# Altium PCB VTS_demo.PcbDoc
Units mil, origin at the board's own origin, x right, y up, seen from the top; angles counter-clockwise.
Board outline 910 x 1965 mil, 2 copper layers (Top Layer, Bottom Layer); 19 components, 18 nets, 80 pads, 5 vias.
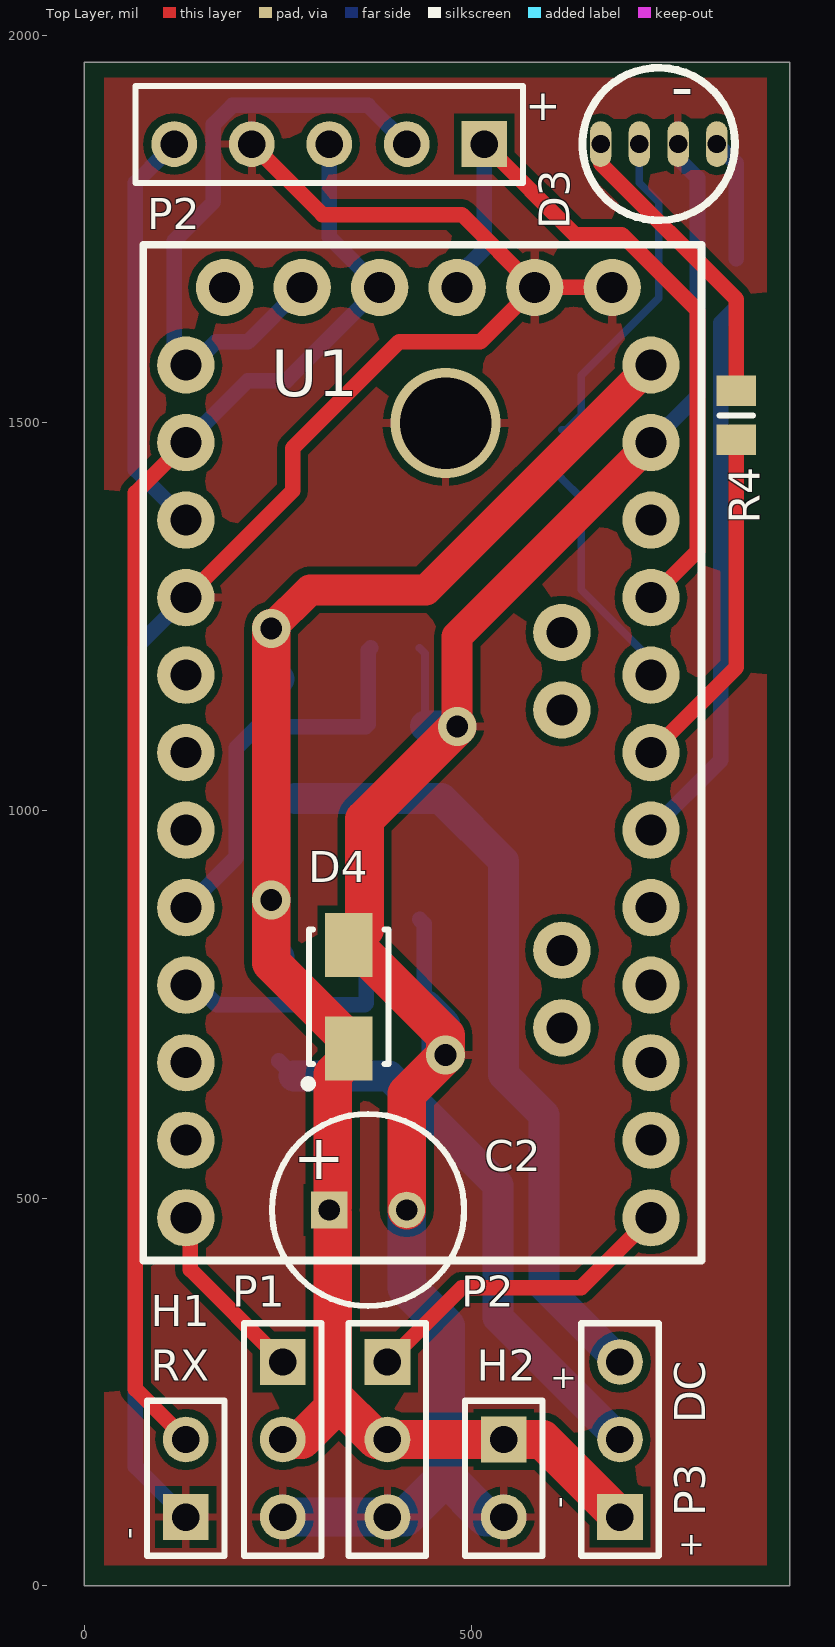
[diagram p0: Top Layer view]
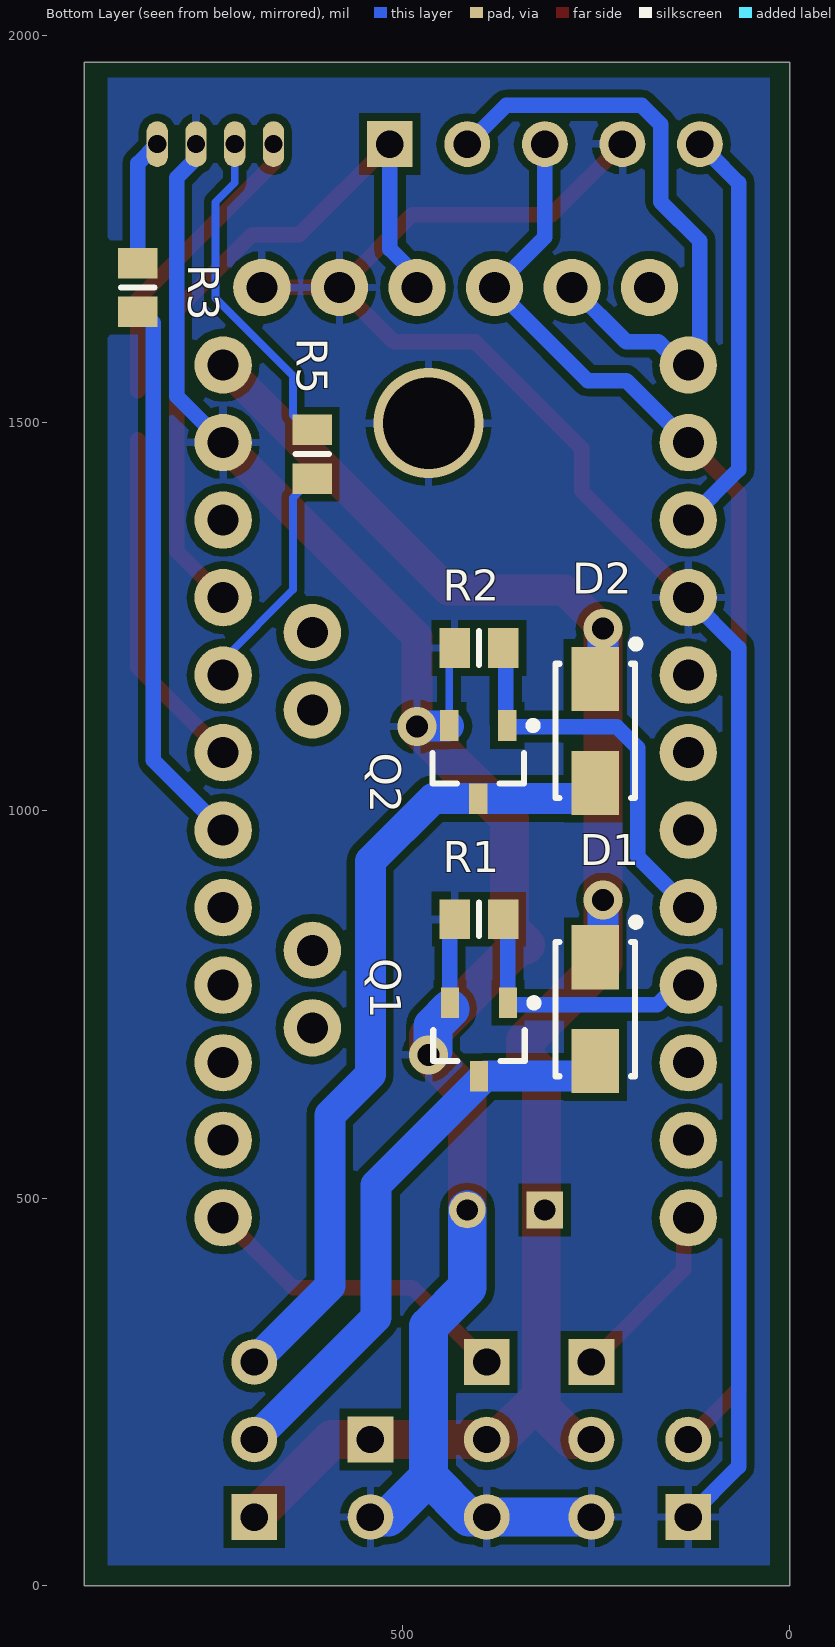
[diagram p1: Bottom Layer view, seen from below]

## Layer stack, top to bottom
Top Solder: solder mask 0.4, Solder Resist, Dk 3.5
Top Layer: signal copper 1.4
Dielectric 1: dielectric 12.6, FR-4, Dk 4.8
Bottom Layer: signal copper 1.4
Bottom Solder: solder mask 0.4, Solder Resist, Dk 3.5

## Board outline
0,1965 910,1965 910,0 0,0

## Design rules (kind name [scope] priority, off if disabled: settings)
Clearance [All] p1: gap=10 ignorepadtopadclearanceinfootprint=FALSE except(0: Arc-Hole Track-Hole SMDPad-Hole THPad-Hole Via-Hole Fill-Hole Poly-Hole Region-Hole Text-Hole)
ComponentClearance Ardu_diode [InComponent('U1') vs InComponent('D4')] p1: gap=0 collisioncheckmode=3 verticalgap=0 showdistances=FALSE
ComponentClearance Ardu_res [InComponent('U1') vs InComponent('R4')] p2: gap=0 collisioncheckmode=3 verticalgap=0 showdistances=FALSE
ComponentClearance Ardu_cap [InComponent('U1') vs InComponent('C2')] p3: gap=0 collisioncheckmode=3 verticalgap=0 showdistances=FALSE
ComponentClearance [All] p4: gap=10 collisioncheckmode=3 verticalgap=10 showdistances=FALSE
HoleSize [All] p1: absolutevalues=TRUE maxlimit=196.85 minlimit=1 maxpercent=80.000 minpercent=20.000
PolygonConnect [All] p1: connectstyle=Relief reliefconductorwidth=10 reliefentries=4 polygonreliefangle="90 Angle" airgapwidth=10
RoutingVias [All] p1: holewidth=28 width=50 viastyle="Through Hole" minholewidth=28 minwidth=50 maxholewidth=28 maxwidth=50
SolderMaskExpansion [All] p1: expansion=4
Width [All] p1: maxlimit=50 minlimit=10 preferedwidth=20
28 further rules are at their usual default settings.

## Classes and differential pairs
component class VTS_demo: C2 D1 D2 D3 D4 H1 H2 P1 P2 P3 Q1 Q2 R1 R2 R3 R4 R5 U1

## Components (designator, comment, footprint, x,y, rotation, side; value= is the part's Value field where it differs from the comment)
C2 "220uF" CapPol6.3 365.94,484.57 r180 top
D1 "Diode 1N4007" DIOM4326X20N 250.94,743.71 r270 bottom
D2 "Diode 1N4007" DIOM4326X20N 250.94,1102.57 r270 bottom
D3 "LED" "RGB LED" 815.94,1859.57 r180 top
D4 "Diode 1N4007" DIOM4326X20N 340.94,759.57 r90 top
H1 "Bus" HDR1X2 130.94,88.51 r90 top
H2 "Power" HDR1X2 540.94,188.51 r270 top
P1 "Header 3" HDR1X3 255.94,288.51 r270 top
P2 "UART" UART 515.94,1859.57 r180 top
P2 "Header 3" HDR1X3 390.94,288.51 r270 top
P3 "Header 3" HDR1X3 690.94,88.51 r90 top
Q1 "MOSFET-N" SOT95P245X110-3N 400.94,704.57 r270 bottom
Q2 "MOSFET-N" SOT95P245X110-3N 402.04,1062.33 r270 bottom
R1 "10k" 6-0805_L 400.94,859.57 r180 bottom value=10K
R2 "10k" 6-0805_L 400.94,1209.57 r180 bottom value=10K
R3 "Res" 6-0805_L 840.94,1674.57 r90 bottom value=10K
R4 "Res" 6-0805_L 840.94,1509.57 r90 top value=10K
R5 "Res" 6-0805_L 615.94,1459.57 r90 bottom value=10K
U1 "ARDUINO_PRO_MINI" MODULE_ARDUINO_PRO_MINI 430.94,1074.57 r0 top

## Footprints (in the part's own frame and the unit in brackets; to place one, negate y for a bottom-side part, rotate by r counter-clockwise, add the part's x,y. Pads: shape width x height; smd on the part's side, far side on the other; paste and mask are expansions set on the pad)
6-0805_L [mm] "Chip Resistor, Body 2.0x1.2mm, IPC High Density"
  rect 1x1.3 smd: 1(-0.8,0) 2(0.8,0)
  silkscreen extent 0,-0.55 0,0.55, body extent -1.07,-0.7 1.07,0.7, height 0.7
CapPol6.3 [mm] "Polarized Capacitor (Radial); 2 Leads"
  rect 1.2x1.2 hole 0.7: 1(1.27,0)
  round 1.2 hole 0.7: 2(-1.27,0)
  silkscreen extent -3.15,-3.15 3.15,3.15
DIOM4326X20N [mm] "Molded Diode, 2-Leads, Body 4.30x2.55mm, IPC Medium Density"
  rect 2.1x1.55 smd: 1(-1.7,0) 2(1.7,0)
  silkscreen extent -2.97,-1.3 2.2,1.45, body extent -2.2,-1.3 2.2,1.3, height 2
HDR1X2 [mm] "Connector; Header; 2 Position"
  rect 1.5x1.5 hole 0.9: 1(0,0)
  round 1.5 hole 0.9: 2(2.54,0)
  silkscreen extent -1.27,-1.27 3.81,1.27
HDR1X3 [mm] "Connector; Header; 3 Position"
  rect 1.5x1.5 hole 0.9: 1(0,0)
  round 1.5 hole 0.9: 2(2.54,0) 3(5.08,0)
  silkscreen extent -1.27,-1.27 6.35,1.27
MODULE_ARDUINO_PRO_MINI [mil]
  round 74 hole 40: JP1_1(250,600) JP1_2(150,600) JP1_3(50,600) JP1_4(-50,600) JP1_5(-150,600) JP1_6(-250,600) JP2_1(185,55) JP2_2(185,155) JP3_1(185,-355) JP3_2(185,-255) JP6_1(300,500) JP6_2(300,400) JP6_3(300,300) JP6_4(300,200) JP6_5(300,100) JP6_6(300,0) JP6_7(300,-100) JP6_8(300,-200) JP6_9(300,-300) JP6_10(300,-400) JP6_11(300,-500) JP6_12(300,-600) JP7_1(-300,-600) JP7_2(-300,-500) JP7_3(-300,-400) JP7_4(-300,-300) JP7_5(-300,-200) JP7_6(-300,-100) JP7_7(-300,0) JP7_8(-300,100) JP7_9(-300,200) JP7_10(-300,300) JP7_11(-300,400) JP7_12(-300,500)
  silkscreen extent -355,-655 365,655
"RGB LED" [mm] "5mm"
  oval 0.7x1.5 hole 0.6: 1(0,0) 2(1.27,0) 3(2.54,0) 4(3.81,0)
  silkscreen extent -0.6,-2.5 4.4,2.5
SOT95P245X110-3N [mm] "SOT23, 3-Leads, Body 2.90x2.45mm, Pitch 0.95mm, IPC Medium Density"
  rect 1x0.6 smd: 1(-1.2,0.95) 2(-1.2,-0.95) 3(1.2,0)
  silkscreen extent -1.32,-1.5 0.7,1.92, body extent -0.7,-1.5 0.7,1.5, height 1.1
UART [mm] "Connector; Header; 5 Position, UART, for uploading"
  rect 1.5x1.5 hole 0.9: 1(0,0)
  round 1.5 hole 0.9: 2(2.54,0) 3(5.08,0) 4(7.62,0) 5(10.16,0)
  silkscreen extent -1.27,-1.91 11.43,1.27

## Part data
C2: library part "220uF Cap", "220uF Polarized Capacitor (Radial)", LatestRevisionDate=17-Jul-2002, LatestRevisionNote="Re-released for DXP Platform.", PackageDescription="Polarized Capacitor (Radial); 2 Leads", PackageReference=RB7.6-15, Published=8-Jun-2000, Publisher="Altium Limited"
D1 D2 D4: library part "Diode 1N4001", "1 Amp General Flyback diode", Code_JEDEC=DO-204-AL, ComponentLink1Description="Manufacturer Link", ComponentLink1URL=http://www.fairchildsemi.com/, ComponentLink2Description=Datasheet, ComponentLink2URL=http://www.fairchildsemi.com/ds/1N%2F1N4001.pdf, DatasheetVersion=1998, LatestRevisionDate=17-Jul-2002, LatestRevisionNote="Re-released for DXP Platform.", PackageDescription="Diode, Axial; Body 5.2 x 2.7 mm (LxDia. max), Lead Dia. 0.86 mm (max)", PackageReference=DO-41, PackageVersion=Aug-1999, Published=8-Jun-2000, Publisher="Altium Limited"
D3: library part "RGB LED"
P1 P2 P3: "Header, 3-Pin", LatestRevisionDate=17-Jul-2002, LatestRevisionNote="Re-released for DXP Platform.", Publisher="Altium Limited"
P2: "Header, 5-Pin, UART, for uploading", LatestRevisionDate=17-Jul-2002, LatestRevisionNote="Re-released for DXP Platform.", Publisher="Altium Limited"
Q1 Q2: library part IRLM2502, "N-Channel MOSFET", LatestRevisionDate=17-Jul-2002, LatestRevisionNote="Re-released for DXP Platform.", PackageDescription="TO, Flat Index; 3 In-Line, Axial Leads; Body Dia. 4.6mm; Lead Dia. 0.5 mm (max)", PackageReference=E3, PackageVersion=1995/1996, Published=8-Jun-2000, Publisher="Altium Limited"
R1 R2: library part "10k res", "10k Resistor", LatestRevisionDate=17-Jul-2002, LatestRevisionNote="Re-released for DXP Platform.", PackageDescription="Axial Device, Thru-Hole; 2 Leads; 0.3 in Pin Spacing", PackageReference=AXIAL-0.3, Published=8-Jun-2000, Publisher="Altium Limited"
R3 R4 R5: library part res, "10k Resistor", LatestRevisionDate=17-Jul-2002, LatestRevisionNote="Re-released for DXP Platform.", PackageDescription="Axial Device, Thru-Hole; 2 Leads; 0.3 in Pin Spacing", PackageReference=AXIAL-0.3, Published=8-Jun-2000, Publisher="Altium Limited"
U1: "ATmega328 Arduino Pro Mini 328 5V/16MHz AVRAR ATmega AVR MCU 8-Bit Embedded Evaluation Board", Package=None, Availability=Unavailable, MP=ARDUINO_PRO_MINI, Price=None

## Via types
v1: diameter 50, hole 28, Top Layer to Bottom Layer, tented both sides, 4 vias
v2: diameter 141.73, hole 118.11, Top Layer to Bottom Layer, 1 vias

## Nets (pads, with @x,y where several pads share a name; then routed paths per layer and width w, separated by ;. In a path a pad name is that pad's centre, name@x,y a point inside that pad or via, vN(x,y) a via of type N, cw(c..) or ccw(c..) an arc to the next point about the centre after c; other vN are vias at no path point)
"DC motor out 1": D1.2 P3.2 Q1.3 | length 742.4
  Bottom Layer w20: D1.2 D1.2@270.39,657.33
  Bottom Layer w40: D1.2@270.39,657.33 393.06,657.33 533.61,516.78 533.61,345.83 P3.2
"DC motor out 2": D2.2 P3.3 Q2.3 | length 1040.1
  Bottom Layer w20: D2.2 D2.2@271.49,1015.09
  Bottom Layer w40: D2.2@271.49,1015.09 Q2.3 460.43,1015.09 540.94,934.57 540.94,659.57 593.14,607.37 593.14,386.31 P3.3
"DC motor sig 1": Q1.1 R1.2 U1.JP7_4 | length 346.4
  Bottom Layer w20: U1.JP7_4 145.55,774.57 170.82,749.3 361.72,749.3 363.54,751.11 Q1.1 R1.2@363.54,853.67
"DC motor sig 2": Q2.1 R2.2 U1.JP7_5 | length 515.7
  Bottom Layer w20: U1.JP7_5 195.94,939.57 195.94,1080.77 223.32,1108.16 363.22,1108.16 Q2.1 366.45,1111.39 366.45,1206.58 R2.2
GND: C2.2 D3.2 D4.2 H1.1 H2.2 P1.3 P2.3@390.94,88.51 P2.4 Q1.2 Q2.2 R1.1 R2.1 U1.JP1_1 U1.JP1_2 U1.JP6_2 U1.JP7_9 | length 5105.1
  Top Layer w20: U1.JP7_9 268.6,1412.24 268.6,1467.24 405.94,1604.57 510.94,1604.57 U1.JP1_2 ; P2.4 307.01,1768.5 487.01,1768.5 U1.JP1_2 ; U1.JP1_1 U1.JP1_2
  Top Layer w40: D4.2 D4.2@349.01,826.5 ; v1(480.94,1108.16) 480.94,1224.57 U1.JP6_2
  Top Layer w50: D4.2 361.45,847.02 361.45,988.67 v1(480.94,1108.16) ; D4.2@349.01,826.5 465.94,709.57 v1(465.94,684.57) 415.94,634.57 C2.2
  Bottom Layer w10: R2.1 439.44,1202.57 Q2.2
  Bottom Layer w20: H1.1 65.94,153.51 65.94,1209.57 U1.JP7_9 ; R1.1 438.34,853.67 Q1.2 Q1.2@438.34,743.94 ; Q2.2 Q2.2@440.15,1108.87 ; v1@460.2,690.31 v1(465.94,684.57) ; v1@480.23,1108.87 v1(480.94,1108.16) ; U1.JP6_2 790.94,1534.57 790.94,1815.88 765.94,1840.88 D3.2
  Bottom Layer w40: Q2.2@440.15,1108.87 v1@480.23,1108.87
  Bottom Layer w50: P1.3 390.94,88.51 413.9,88.51 465.94,140.55 ; C2.2 415.94,384.57 465.94,334.57 465.94,140.55 ; Q1.2@438.34,743.94 460.2,722.09 v1@460.2,690.31 ; H2.2 517.98,88.51 465.94,140.55
  other v2: 465.94,1499.57
LED_B_sig: R5.1 U1.JP6_5 | length 301.1
  Bottom Layer w10: R5.1 640.94,1403.08 640.94,1284.57 730.94,1194.57 U1.JP6_5
LED_G_sig: R4.1 U1.JP6_6 | length 449.1
  Top Layer w20: U1.JP6_6 840.94,1184.57 R4.1
LED_R_sig: R3.1 U1.JP6_7 | length 717.5
  Bottom Layer w20: U1.JP6_7 820.94,1064.57 820.94,1628.98 835.03,1643.08 R3.1
NetD3_1: D3.1 R3.2 | length 158
  Bottom Layer w20: D3.1 840.94,1834.57 R3.2@840.94,1711.98
NetD3_2: D3.4 R4.2 | length 391
  Top Layer w20: D3.4 665.94,1834.57 840.94,1659.57 R4.2
NetD3_3: D3.3 R5.2 | length 434.1
  Bottom Layer w10: R5.2 621.84,1491.07 640.94,1510.17 640.94,1561.04 740.94,1661.04 740.94,1784.57 715.94,1809.57 D3.3
NetH1_2: H1.2 P2.3@315.94,1859.57 U1.JP1_4 U1.JP7_11 | length 1884.7
  Top Layer w20: H1.2 65.94,253.51 65.94,1409.57 U1.JP7_11
  Bottom Layer w20: U1.JP7_11 210.94,1554.57 260.94,1554.57 U1.JP1_4 315.94,1739.57 P2.3@315.94,1859.57
NetP2_2: P2.2@415.94,1859.57 U1.JP1_5 U1.JP7_12 | length 819.4
  Bottom Layer w20: U1.JP1_5 210.94,1604.57 169.69,1604.57 139.69,1574.57 U1.JP7_12 115.94,1589.57 115.94,1734.57 166.41,1785.05 166.41,1885.05 190.94,1909.57 365.94,1909.57 415.94,1859.57 P2.2@415.94,1849.57
NetP2_5: P2.5 U1.JP7_10 | length 515
  Bottom Layer w20: P2.5@103.44,1847.07 65.94,1809.57 65.94,1439.57 U1.JP7_10
"Servo sig 1": P1.1 U1.JP7_1 | length 237.8
  Top Layer w20: U1.JP7_1 136.87,468.64 136.87,407.57 P1.1
"Servo sig 2": P2.1@390.94,288.51 U1.JP6_12 | length 417.1
  Top Layer w20: P2.1@390.94,288.51 487,384.57 640.94,384.57 U1.JP6_12
VCC: P2.1@515.94,1859.57 U1.JP1_3 U1.JP6_4 | length 958.8
  Top Layer w20: P2.1@515.94,1859.57 632.9,1742.62 693.51,1742.62 790.94,1645.18 790.94,1334.57 U1.JP6_4
  Bottom Layer w20: U1.JP1_3 480.94,1689.19 515.94,1724.19 P2.1@515.94,1859.57
Vp: C2.1 D1.1 D2.1 D4.1 H2.1 P1.2 P2.2@390.94,188.51 P3.1 U1.JP6_1 | length 2350.7
  Top Layer w40: v1(240.94,1234.57) 290.94,1284.57 440.94,1284.57 U1.JP6_1 ; C2.1 C2.1@320.43,489.06 ; D4.1 D4.1@340.94,703.47 ; H2.1@533.46,188.51 H2.1@540.94,181.04
  Top Layer w50: v1(240.94,1234.57) v1(240.94,884.57) 240.94,803.47 D4.1@340.94,703.47 ; P1.2 280.49,188.51 320.46,228.49 320.46,244.49 ; C2.1@320.46,480.05 320.46,244.49 ; C2.1@320.43,489.06 320.43,659.54 340.94,680.05 D4.1 ; H2.1@533.46,188.51 390.94,188.51 376.44,188.51 320.46,244.49 ; H2.1 590.94,188.51 P3.1
  Bottom Layer w40: v1(240.94,884.57) 240.94,820.64 D1.1 ; v1(240.94,1234.57) 240.94,1179.5 D2.1
pads on no net: U1.JP1_6 U1.JP2_1 U1.JP2_2 U1.JP3_1 U1.JP3_2 U1.JP6_3 U1.JP6_8 U1.JP6_9 U1.JP6_10 U1.JP6_11 U1.JP7_2 U1.JP7_3 U1.JP7_6 U1.JP7_7 U1.JP7_8

## Polygon pours and split planes (outlines as drawn)
GND on Bottom Layer "Bottom Layer-GND" (solid, pour order 0): 25.94,1945 25.94,26.06 880,26.06 880,1945
GND on Bottom Layer "Bottom Layer-GND 1" (solid, pour order 2): 1325.94,976.06
GND on Top Layer "Top Layer-GND" (solid, pour order 6): 25.94,1945 25.94,26.06 880,26.06 880,1945

## Silkscreen, mask and mechanical layers (free items; w line width, h text height)
Top Overlay:
  text "RX" at 85.94,264.57 h40
  text "+" at 600.94,254.57 h30
  text "DC" at 800.94,209.57 h40 r90
  text "-" at 625.94,99.57 h30 r90
  text "-" at 70.94,59.57 h30 r90
  text "+" at 765.94,39.58 h30
Mechanical 1:
  lines w10: 15,15 15,1955 890,1955 890,15 15,15

## Text inside footprints (layer, text, board x,y; h text height)
C2: Top Overlay "+" at 336.49,574.57 h59.06 r180
D3: Top Overlay "-" at 785.94,1949.57 h60 r180
P2: Top Overlay "+" at 614.58,1924.57 h39.37 r180